# EAGLE board Balise ir émmetrice (EAGLE 6.1)
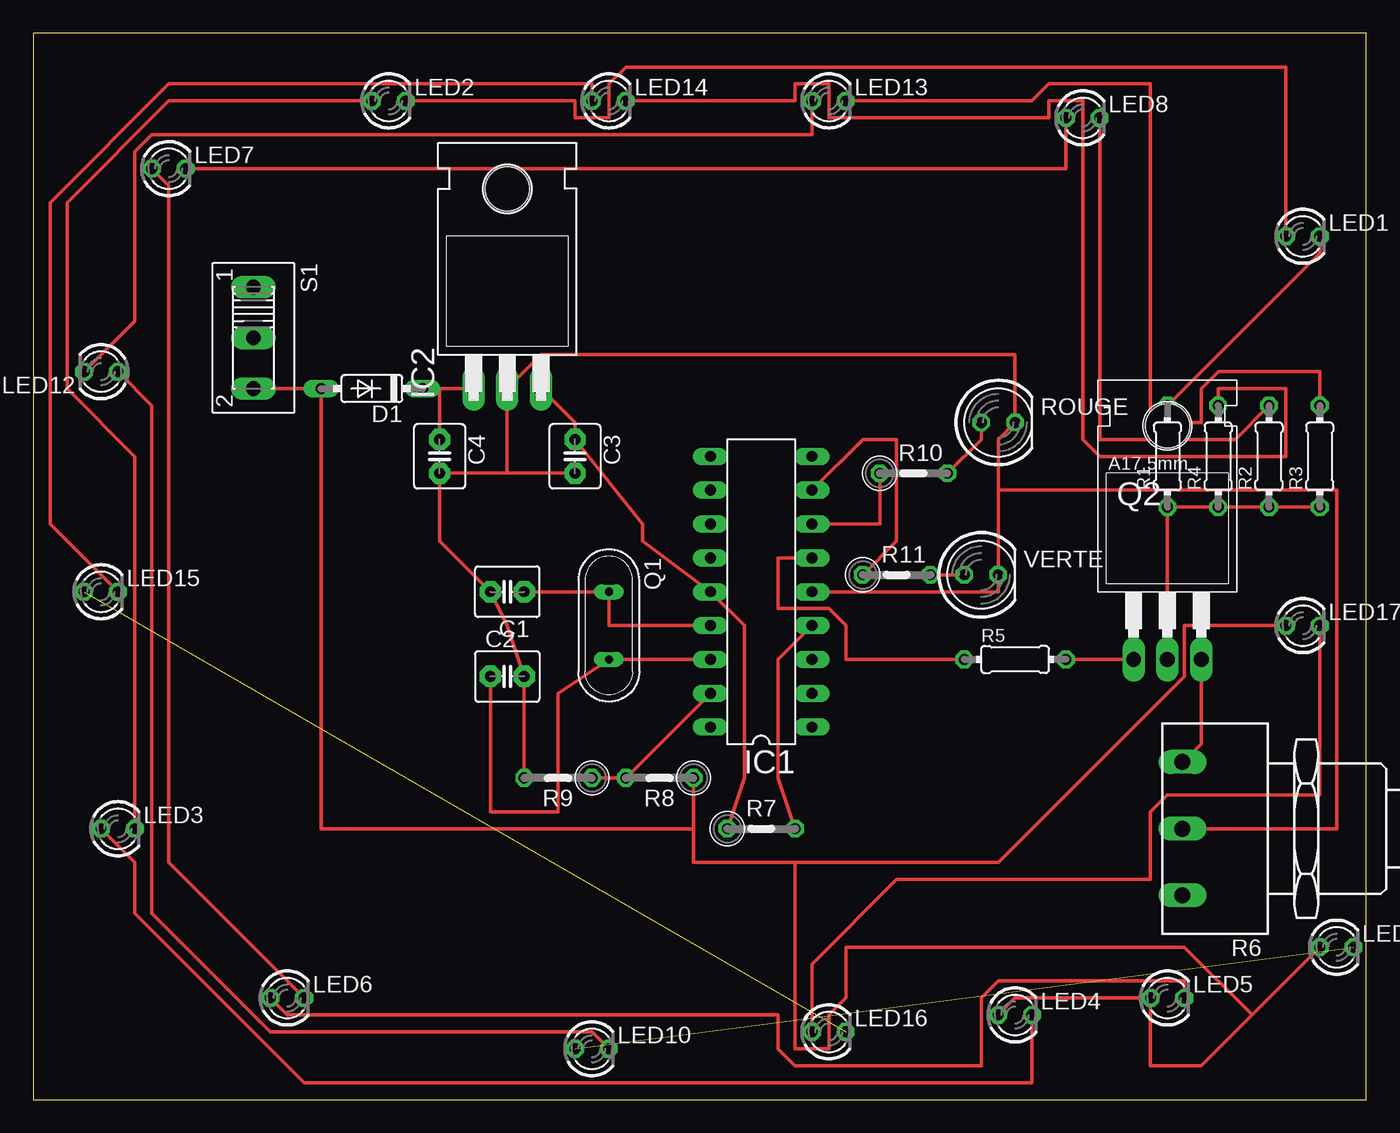
[diagram p0: board, top side]

Size 100 x 80 mm. Coordinates in mm from the lower left corner, seen from the top.
Outline: 0,0 100,0 100,80 0,80 0,0
Copper layers (1*16): Top 0.035mm / dielectric 1.5mm / Bottom 0.035mm
Design rules: minimum track width 10mil, minimum drill 24mil, track to track 8mil, track to pad 8mil, pad to pad 8mil, via to via 8mil, smd to smd 8mil, copper to edge 40mil, drill to drill 8mil, minimum pad ring 10mil, minimum via ring 8mil, stop-mask expansion 4mil, vias tented up to drill 0mil, thermal gap 10mil

## Footprints (pad centres in the part's own frame; a part is rotated, then mirrored left to right if it is on the bottom)
C2.5-4 = drill 0.813 pad 1.6 octagon: 1 -1.27,0; 2 1.27,0
DO35-7 = drill 0.813 long: A 3.81,0; C -3.81,0
DIL18 = drill 0.813 long: 1 -10.16,-3.81; 2 -7.62,-3.81; 3 -5.08,-3.81; 4 -2.54,-3.81; 5 0,-3.81; 6 2.54,-3.81; 7 5.08,-3.81; 8 7.62,-3.81; 9 10.16,-3.81; 10 10.16,3.81; 11 7.62,3.81; 12 5.08,3.81; 13 2.54,3.81; 14 0,3.81; 15 -2.54,3.81; 16 -5.08,3.81; 17 -7.62,3.81; 18 -10.16,3.81
TO220H = drill 1.118 long: 1 -2.54,-10.16; 2 0,-10.16; 3 2.54,-10.16 | hole 3.302: 0,4.826
LED3MM = drill 0.813 octagon: A -1.27,0; K 1.27,0
QS = drill 0.61 long: 1 -2.54,0; 2 2.54,0
TO220 = drill 1.118 long: 1 -2.54,-6.35; 2 0,-6.35; 3 2.54,-6.35 | hole 3.302: 0,11.176
0204/7 = drill 0.813 octagon: 1 -3.81,0; 2 3.81,0
PC16S = drill 1.2 long: 1A -5,6.5; 1E 5,6.5; 1S 0,6.5
0207/5V = drill 0.813 octagon: 1 -2.54,0; 2 2.54,0
LED5MM = drill 0.813 octagon: A -1.27,0; K 1.27,0
255SB = drill 1.118 long: 1 -3.81,0; 2 0,0; 3 3.81,0

## Placement (x,y rotation side)
C1  22pF  [C2.5-4]  35.56,38.1 180 top
C2  22pF  [C2.5-4]  35.56,31.75 0 top
C3  0.1uF  [C2.5-4]  40.64,48.26 270 top
C4  0.33uF  [C2.5-4]  30.48,48.26 270 top
D1  1N4150  [DO35-7]  25.4,53.34 180 top
IC1  PIC16F84AP  [DIL18]  54.61,38.1 90 top
IC2  7805T  [TO220H]  35.56,63.5 0 top
LED1  [LED3MM]  95.25,64.77 0 top
LED2  [LED3MM]  26.67,74.93 0 top
LED3  [LED3MM]  6.35,20.32 0 top
LED4  [LED3MM]  73.66,6.35 0 top
LED5  [LED3MM]  85.09,7.62 0 top
LED6  [LED3MM]  19.05,7.62 0 top
LED7  [LED3MM]  10.16,69.85 0 top
LED8  [LED3MM]  78.74,73.66 0 top
LED9  [LED3MM]  97.79,11.43 0 top
LED10  [LED3MM]  41.91,3.81 0 top
LED12  [LED3MM]  5.08,54.61 180 top
LED13  [LED3MM]  59.69,74.93 0 top
LED14  [LED3MM]  43.18,74.93 0 top
LED15  [LED3MM]  5.08,38.1 0 top
LED16  [LED3MM]  59.69,5.08 0 top
LED17  [LED3MM]  95.25,35.56 0 top
Q1  [QS]  43.18,35.56 270 top
Q2  TIP122  [TO220]  85.09,39.37 0 top
R1  26  [0204/7]  85.09,48.26 90 top
R2  26  [0204/7]  92.71,48.26 90 top
R3  26  [0204/7]  96.52,48.26 90 top
R4  26  [0204/7]  88.9,48.26 90 top
R5  100  [0204/7]  73.66,33.02 0 top
R6  1k  [PC16S]  92.71,20.32 90 top
R7  10k  [0207/5V]  54.61,20.32 0 top
R8  14.3k  [0207/5V]  46.99,24.13 180 top
R9  10k  [0207/5V]  39.37,24.13 180 top
R10  130  [0207/5V]  66.04,46.99 0 top
R11  130  [0207/5V]  64.77,39.37 0 top
ROUGE  [LED5MM]  72.39,50.8 0 top
S1  [255SB]  16.51,57.15 270 top
VERTE  [LED5MM]  71.12,39.37 0 top

## Library data of the parts
C1-C4 = capacitor-wima
D1 = diode
IC1 = microchip; MF: MICROCHIP; MPN: PIC16F84A-04I/P; OC_FARNELL: 9760865; OC_NEWARK: 69K7635
IC2 = linear
LED1-LED10 LED12-LED17 ROUGE VERTE = led
Q1 = special
Q2 = transistor-npn
R1-R4 R7-R9 = rcl
R5 R10 R11 = resistor
R6 = piher; OC_FARNELL: 4452940; OC_NEWARK: unknown
S1 = switch

## Nets
N$1: IC1.4 R7.2
N$2: IC1.7 R10.1
N$3: R10.2 ROUGE.A
N$4: C4.1 D1.C IC2.1
N$5: Q2.3 R6.1E
N$6: C3.1 IC1.14 IC2.3 R7.1
N$7: C1.1 IC1.15 Q1.1
N$8: C2.1 IC1.16 Q1.2
N$10: Q2.2 R1.1 R2.1 R3.1 R4.1
N$11: IC1.6 R5.1
N$12: Q2.1 R5.2
N$13: LED1.K R1.2
N$14: LED1.A LED2.K
N$15: LED2.A LED3.K
N$16: LED3.A LED4.K
N$17: IC1.17 R8.2 R9.1
N$18: LED16.A LED17.K
N$19: LED9.K LED10.A
N$20: LED5.K LED6.A
N$21: LED6.K LED7.A
N$22: LED10.K LED12.A
N$23: LED15.A LED16.K
N$24: LED7.K LED8.A
N$25: LED12.K LED13.A
N$26: LED14.A LED15.K
N$27: LED14.K R4.2
N$28: LED13.K R3.2
N$29: LED8.K R2.2
N$30: D1.A LED4.A LED5.A LED9.A LED17.A R8.1 S1.3
N$31: IC1.8 R11.1
N$32: R11.2 VERTE.A
N$33: C1.2 C2.2 C3.2 C4.2 IC1.5 IC2.2 R6.1S R9.2 ROUGE.K VERTE.K

## Tracks (layer width: path | path; a pad name or v marks a point on that pad's centre or on a via)
N$1
  Top 0.254: R7.2 55.88,24.13 55.88,33.02 IC1.4
N$2
  Top 0.254: IC1.7 63.5,43.18 R10.1
N$3
  Top 0.254: R10.2 71.12,49.53 ROUGE.A
N$4
  Top 0.254: IC2.1 30.48,53.34 | 30.48,53.34 C4.1 | 30.48,53.34 D1.C
N$5
  Top 0.254: Q2.3 87.63,26.67 86.36,25.4 R6.1E
N$6
  Top 0.254: R7.1 53.34,24.13 53.34,35.56 IC1.14 45.72,41.91 45.72,43.18 C3.1 40.64,50.8 IC2.3
N$7
  Top 0.254: C1.1 Q1.1 43.18,35.56 IC1.15
N$8
  Top 0.254: IC1.16 Q1.2 39.37,30.48 39.37,21.59 34.29,21.59 C2.1
N$10
  Top 0.254: R3.1 R2.1 R4.1 R1.1 Q2.2
N$11
  Top 0.254: R5.1 60.96,33.02 60.96,35.56 59.69,36.83 55.88,36.83 55.88,40.64 IC1.6
N$12
  Top 0.254: Q2.1 R5.2
N$13
  Top 0.254: R1.2 96.52,63.5 LED1.K
N$14
  Top 0.254: LED2.K 40.64,74.93 40.64,73.66 43.18,73.66 43.18,76.2 44.45,77.47 93.98,77.47 LED1.A
N$15
  Top 0.254: LED3.K 7.62,48.26 2.54,53.34 2.54,67.31 10.16,74.93 LED2.A
N$16
  Top 0.254: LED3.A 7.62,17.78 7.62,13.97 20.32,1.27 74.93,1.27 LED4.K
N$17
  Top 0.254: R9.1 R8.2 IC1.17
N$18
  Top 0.254: LED16.A 58.42,10.16 64.77,16.51 83.82,16.51 83.82,21.59 85.09,22.86 96.52,22.86 LED17.K
N$19  (1 unrouted)
N$20
  Top 0.254: LED6.A 19.05,6.35 55.88,6.35 55.88,3.81 57.15,2.54 71.12,2.54 71.12,7.62 72.39,8.89 86.36,8.89 LED5.K
N$21
  Top 0.254: LED6.K 10.16,17.78 10.16,68.58 LED7.A
N$22
  Top 0.254: LED10.K 41.91,5.08 17.78,5.08 8.89,13.97 8.89,52.07 LED12.A
N$23  (1 unrouted)
N$24
  Top 0.254: LED7.K 77.47,69.85 LED8.A
N$25
  Top 0.254: LED12.K 7.62,58.42 7.62,71.12 8.89,72.39 58.42,72.39 LED13.A
N$26
  Top 0.254: LED15.K 1.27,43.18 1.27,67.31 10.16,76.2 41.91,76.2 LED14.A
N$27
  Top 0.254: LED14.K 57.15,74.93 57.15,76.2 59.69,76.2 59.69,73.66 76.2,73.66 76.2,74.93 78.74,74.93 78.74,49.53 80.01,48.26 93.98,48.26 93.98,53.34 88.9,53.34 R4.2
N$28
  Top 0.254: LED13.K 74.93,74.93 76.2,76.2 83.82,76.2 83.82,50.8 87.63,50.8 87.63,53.34 88.9,54.61 96.52,54.61 R3.2
N$29
  Top 0.254: R2.2 90.17,49.53 80.01,49.53 LED8.K
N$30
  Top 0.254: LED4.A 73.66,7.62 LED5.A 83.82,2.54 87.63,2.54 91.44,6.35 | 91.44,6.35 LED9.A | S1.3 D1.A 21.59,20.32 49.53,20.32 | 49.53,20.32 R8.1 | LED17.A 86.36,35.56 86.36,31.75 72.39,17.78 57.15,17.78 | 57.15,17.78 49.53,17.78 49.53,20.32 | 91.44,6.35 86.36,11.43 60.96,11.43 60.96,7.62 59.69,6.35 59.69,3.81 57.15,3.81 57.15,17.78
N$31
  Top 0.254: IC1.8 62.23,49.53 64.77,49.53 64.77,41.91 R11.1
N$32
  Top 0.254: VERTE.A R11.2
N$33
  Top 0.254: R9.2 C2.2 35.56,35.56 C1.2 30.48,41.91 C4.2 35.56,46.99 | 35.56,46.99 C3.2 | 35.56,46.99 IC2.2 38.1,55.88 73.66,55.88 ROUGE.K 72.39,49.53 72.39,45.72 | IC1.5 72.39,38.1 VERTE.K 72.39,45.72 | R6.1S 97.79,20.32 97.79,45.72 72.39,45.72